# Altium PCB PCB_CONTROL.PcbDoc (part 12 of 15)
Units mil, origin at the board's own origin, x right, y up, seen from the top; angles counter-clockwise.
Board outline 7360.03 x 4773.15 mil, 2 copper layers (Top Layer, Bottom Layer); 73 components, 135 nets, 396 pads, 106 vias.
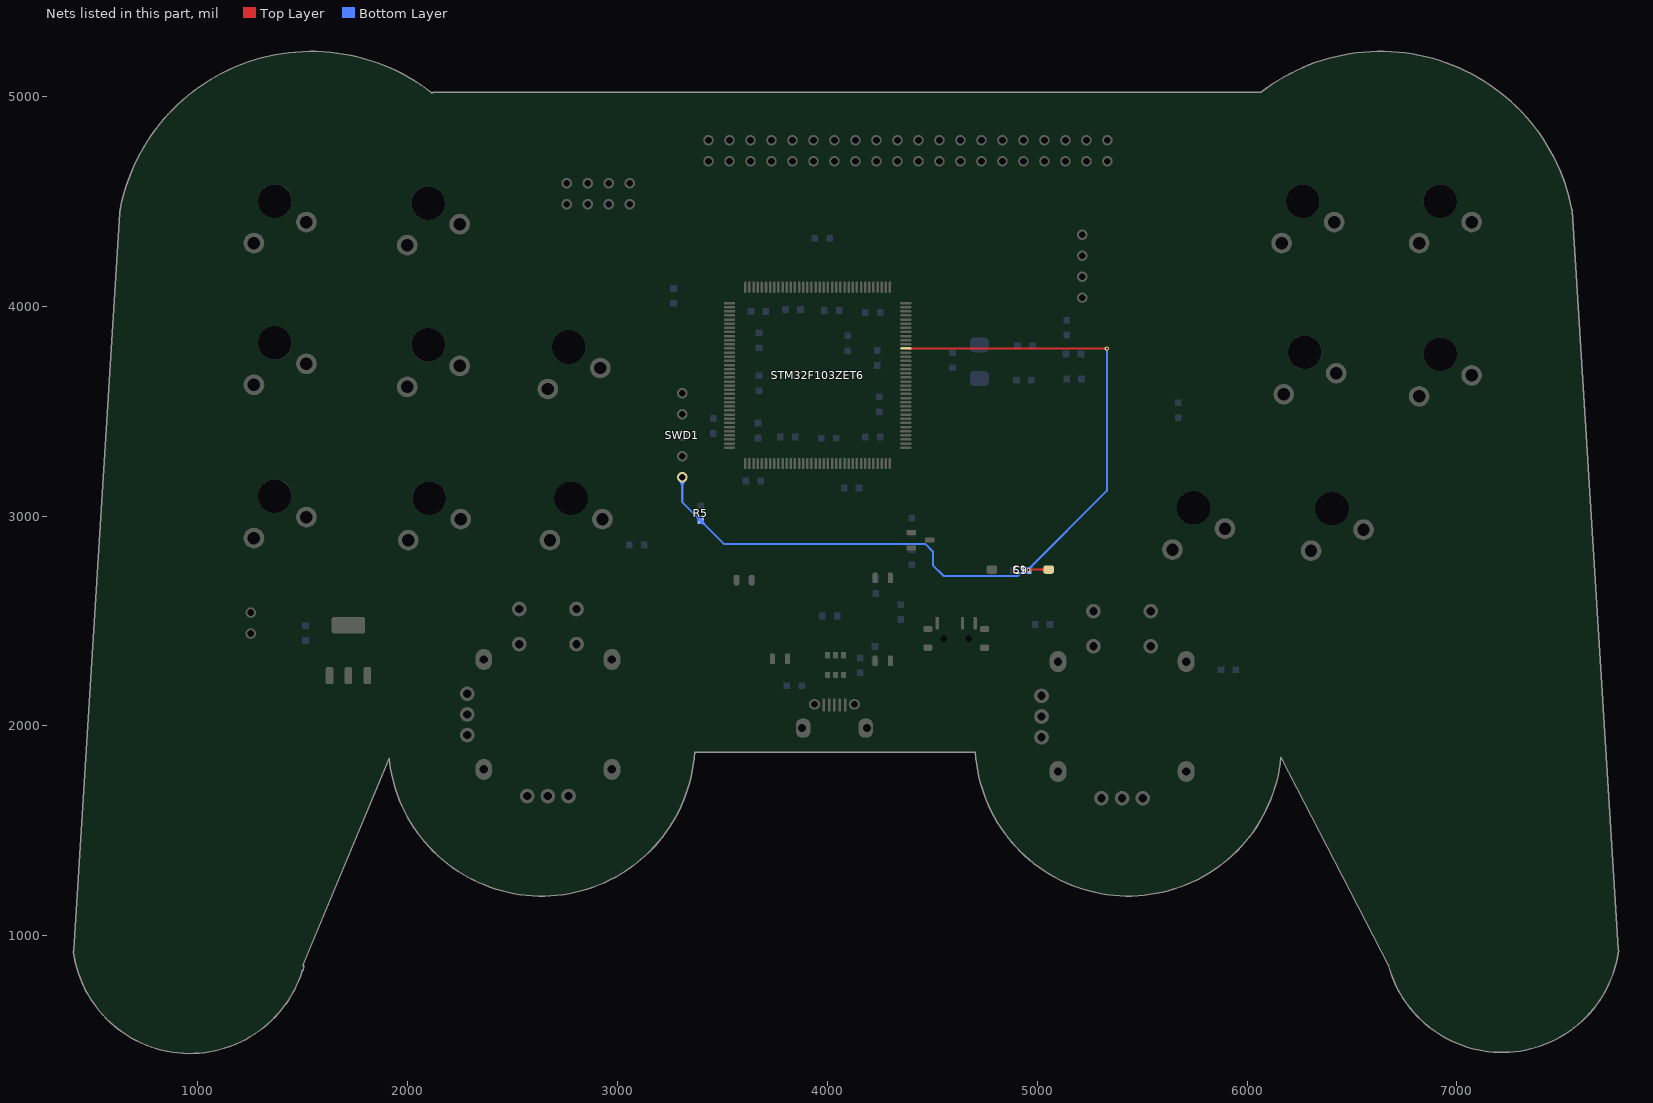
[diagram p12: the nets of this part, all layers, seen from the top]

## Via types
v1: diameter 20, hole 10, Top Layer to Bottom Layer, 104 vias
v2: diameter 30, hole 20, Top Layer to Bottom Layer, 2 vias

## Nets (pads, with @x,y where several pads share a name; then routed paths per layer and width w, separated by ;. In a path a pad name is that pad's centre, name@x,y a point inside that pad or via, vN(x,y) a via of type N, cw(c..) or ccw(c..) an arc to the next point about the centre after c; other vN are vias at no path point) (continued)
NRST: C9.1 R5.1 S1.1 STM32F103ZET6.25 SWD1.5 | length 12548.3
  Top Layer w10: STM32F103ZET6.25@4375,3797.95 STM32F103ZET6.25@4375,3797.95 v1(5332.3,3798) 5292.3,3798 ; STM32F103ZET6.25@4396,3797.95 4432,3798 ; v1@4962,2745 S1.1@5055,2745 ; v1@4962.54,2738.46 cw(c4978.31,2722.69) 4978.31,2745 ; v1@4962.54,2738.46 cw(c4978.31,2722.69) 4978.31,2745 ; v1@4962.54,2738.46 cw(c4978.31,2722.69) 4978.31,2745 ; v1@4962.54,2738.46 cw(c4978.31,2722.69) 4978.31,2745 ; v1@4962.54,2738.46 cw(c4978.31,2722.69) 4978.31,2745 ; v1@4962.54,2738.46 cw(c4978.31,2722.69) 4978.31,2745 ; v1@4962.54,2738.46 cw(c4978.31,2722.69) 4978.31,2745 ; v1@4962.54,2738.46 cw(c4978.31,2722.69) 4978.31,2745 ; v1@4963.27,2744.6 ccw(c4967.59,2747.23) 4970.12,2742.85 ; v1@4963.27,2744.6 ccw(c4967.59,2747.23) 4970.12,2742.85 ; v1@4963.27,2744.6 ccw(c4967.59,2747.23) 4970.12,2742.85 ; v1@4963.27,2744.6 ccw(c4967.59,2747.23) 4970.12,2742.85 ; v1@4963.27,2744.6 ccw(c4967.59,2747.23) 4970.12,2742.85 ; v1@4963.27,2744.6 ccw(c4967.59,2747.23) 4970.12,2742.85 ; v1@4963.27,2744.6 ccw(c4967.59,2747.23) 4970.12,2742.85 ; v1@4963.27,2744.6 ccw(c4967.59,2747.23) 4970.12,2742.85 ; v1@4963.27,2744.6 ccw(c4967.59,2747.23) 4970.12,2742.85 ; v1@4963.27,2744.6 ccw(c4967.59,2747.23) 4970.12,2742.85 ; v1@4963.27,2744.6 ccw(c4967.59,2747.23) 4970.12,2742.85 ; v1@4963.27,2744.6 ccw(c4967.59,2747.23) 4970.12,2742.85 ; v1@4963.27,2744.6 ccw(c4967.59,2747.23) 4970.12,2742.85 ; v1@4963.27,2744.6 ccw(c4967.59,2747.23) 4970.12,2742.85 ; v1@4963.27,2744.6 ccw(c4967.59,2747.23) 4970.12,2742.85 ; v1@4963.27,2744.6 ccw(c4967.59,2747.23) 4970.12,2742.85 ; v1@4963.27,2744.6 ccw(c4967.59,2747.23) 4970.12,2742.85 ; v1@4963.27,2744.6 ccw(c4967.59,2747.23) 4970.12,2742.85 ; v1@4963.27,2744.6 ccw(c4967.59,2747.23) 4970.12,2742.85 ; v1@4963.27,2744.6 ccw(c4967.59,2747.23) 4970.12,2742.85 ; v1@4963.27,2744.6 ccw(c4967.59,2747.23) 4970.12,2742.85 ; v1@4963.27,2744.6 ccw(c4967.59,2747.23) 4970.12,2742.85 ; v1@4963.27,2744.6 ccw(c4967.59,2747.23) 4970.12,2742.85 ; v1@4963.27,2744.6 ccw(c4967.59,2747.23) 4970.12,2742.85 ; v1@4963.27,2744.6 ccw(c4967.59,2747.23) 4970.12,2742.85 ; v1@4963.27,2744.6 ccw(c4967.59,2747.23) 4970.12,2742.85 ; v1@4963.27,2744.6 ccw(c4967.59,2747.23) 4970.12,2742.85 ; v1@4963.27,2744.6 ccw(c4967.59,2747.23) 4970.12,2742.85 ; 5013.79,2745 cw(c5013.79,2708.79) S1.1@5039.39,2734.39 ; 5013.79,2745 ccw(c5013.79,2781.21) S1.1@5039.39,2755.61 ; 5013.79,2745 ccw(c5013.79,2781.21) S1.1@5039.39,2755.61 ; 5013.79,2745 cw(c5013.79,2708.79) S1.1@5039.39,2734.39 ; 5013.79,2745 ccw(c5013.79,2781.21) S1.1@5039.39,2755.61 ; 5013.79,2745 cw(c5013.79,2708.79) S1.1@5039.39,2734.39 ; 5013.79,2745 ccw(c5013.79,2781.21) S1.1@5039.39,2755.61 ; 5013.79,2745 cw(c5013.79,2708.79) S1.1@5039.39,2734.39 ; 5013.79,2745 ccw(c5013.79,2781.21) S1.1@5039.39,2755.61 ; 5013.79,2745 cw(c5013.79,2708.79) S1.1@5039.39,2734.39 ; 5013.79,2745 ccw(c5013.79,2781.21) S1.1@5039.39,2755.61 ; 5013.79,2745 cw(c5013.79,2708.79) S1.1@5039.39,2734.39 ; 5013.79,2745 ccw(c5013.79,2781.21) S1.1@5039.39,2755.61 ; 5013.79,2745 cw(c5013.79,2708.79) S1.1@5039.39,2734.39 ; 5013.79,2745 ccw(c5013.79,2781.21) S1.1@5039.39,2755.61 ; 5013.79,2745 cw(c5013.79,2708.79) S1.1@5039.39,2734.39 ; 5320.23,3798 cw(c5320.23,3785.93) v1@5328.77,3794.46 ; 5320.23,3798 ccw(c5320.23,3810.07) v1@5328.77,3801.54 ; 5320.23,3798 cw(c5320.23,3785.93) v1@5328.77,3794.46 ; 5320.23,3798 ccw(c5320.23,3810.07) v1@5328.77,3801.54 ; 5320.23,3798 ccw(c5320.23,3810.07) v1@5328.77,3801.54 ; 5320.23,3798 cw(c5320.23,3785.93) v1@5328.77,3794.46 ; 5320.23,3798 ccw(c5320.23,3810.07) v1@5328.77,3801.54 ; 5320.23,3798 cw(c5320.23,3785.93) v1@5328.77,3794.46 ; 5320.23,3798 ccw(c5320.23,3810.07) v1@5328.77,3801.54 ; 5320.23,3798 cw(c5320.23,3785.93) v1@5328.77,3794.46 ; 5320.23,3798 ccw(c5320.23,3810.07) v1@5328.77,3801.54 ; 5320.23,3798 cw(c5320.23,3785.93) v1@5328.77,3794.46 ; 5320.23,3798 ccw(c5320.23,3810.07) v1@5328.77,3801.54 ; 5320.23,3798 cw(c5320.23,3785.93) v1@5328.77,3794.46 ; 5320.23,3798 ccw(c5320.23,3810.07) v1@5328.77,3801.54 ; 5320.23,3798 cw(c5320.23,3785.93) v1@5328.77,3794.46 ; 5320.23,3798 ccw(c5320.23,3810.07) v1@5328.77,3801.54 ; 5320.23,3798 cw(c5320.23,3785.93) v1@5328.77,3794.46 ; 5320.23,3798 ccw(c5320.23,3810.07) v1@5328.77,3801.54 ; 5320.23,3798 cw(c5320.23,3785.93) v1@5328.77,3794.46 ; 5320.23,3798 ccw(c5320.23,3810.07) v1@5328.77,3801.54 ; 5320.23,3798 cw(c5320.23,3785.93) v1@5328.77,3794.46 ; 5320.23,3798 ccw(c5320.23,3810.07) v1@5328.77,3801.54 ; 5320.23,3798 cw(c5320.23,3785.93) v1@5328.77,3794.46 ; 5320.23,3798 ccw(c5320.23,3810.07) v1@5328.77,3801.54 ; 5320.23,3798 cw(c5320.23,3785.93) v1@5328.77,3794.46 ; 5320.23,3798 ccw(c5320.23,3810.07) v1@5328.77,3801.54 ; 5320.23,3798 cw(c5320.23,3785.93) v1@5328.77,3794.46 ; 5320.23,3798 ccw(c5320.23,3810.07) v1@5328.77,3801.54 ; 5320.23,3798 cw(c5320.23,3785.93) v1@5328.77,3794.46 ; 5320.23,3798 ccw(c5320.23,3810.07) v1@5328.77,3801.54 ; 5320.23,3798 cw(c5320.23,3785.93) v1@5328.77,3794.46 ; 5320.23,3798 ccw(c5320.23,3810.07) v1@5328.77,3801.54 ; 5320.23,3798 cw(c5320.23,3785.93) v1@5328.77,3794.46
  Bottom Layer w10: SWD1.5@3310,3185 3310,3066 R5.1@3398,2978 3510,2866 4469,2866 4504,2831 4504,2766.3 4556.3,2714 4907.56,2714 4934.56,2741 ; C9.1@4953.65,2751.1 4941.31,2739.79 ; C9.1@4955.14,2751.62 4941.31,2742.21 ; C9.1@4959,2747 5332.3,3120.3 v1(5332.3,3798) 5332.3,3758 ; C9.1@4967.23,2754.07 v1(4959,2742) ; SWD1.5@3295.86,3170.86 cw(c3261.72,3136.72) 3310,3136.72 ; SWD1.5@3295.86,3170.86 cw(c3261.72,3136.72) 3310,3136.72 ; SWD1.5@3295.86,3170.86 cw(c3261.72,3136.72) 3310,3136.72 ; SWD1.5@3295.86,3170.86 cw(c3261.72,3136.72) 3310,3136.72 ; SWD1.5@3295.86,3170.86 cw(c3261.72,3136.72) 3310,3136.72 ; SWD1.5@3295.86,3170.86 cw(c3261.72,3136.72) 3310,3136.72 ; SWD1.5@3295.86,3170.86 cw(c3261.72,3136.72) 3310,3136.72 ; SWD1.5@3295.86,3170.86 cw(c3261.72,3136.72) 3310,3136.72 ; 3310,3136.72 cw(c3358.28,3136.72) SWD1.5@3324.14,3170.86 ; 3310,3136.72 cw(c3358.28,3136.72) SWD1.5@3324.14,3170.86 ; 3310,3136.72 cw(c3358.28,3136.72) SWD1.5@3324.14,3170.86 ; 3310,3136.72 cw(c3358.28,3136.72) SWD1.5@3324.14,3170.86 ; 3310,3136.72 cw(c3358.28,3136.72) SWD1.5@3324.14,3170.86 ; 3310,3136.72 cw(c3358.28,3136.72) SWD1.5@3324.14,3170.86 ; 3310,3136.72 cw(c3358.28,3136.72) SWD1.5@3324.14,3170.86 ; 3310,3136.72 cw(c3358.28,3136.72) SWD1.5@3324.14,3170.86 ; 3379.22,2996.78 cw(c3360.44,2978) R5.1@3387,2978 ; 3379.22,2996.78 ccw(c3398,3015.56) R5.1@3398,2989 ; 3379.22,2996.78 ccw(c3398,3015.56) R5.1@3398,2989 ; 3379.22,2996.78 cw(c3360.44,2978) R5.1@3387,2978 ; 3379.22,2996.78 ccw(c3398,3015.56) R5.1@3398,2989 ; 3379.22,2996.78 cw(c3360.44,2978) R5.1@3387,2978 ; 3379.22,2996.78 ccw(c3398,3015.56) R5.1@3398,2989 ; 3379.22,2996.78 cw(c3360.44,2978) R5.1@3387,2978 ; 3379.22,2996.78 ccw(c3398,3015.56) R5.1@3398,2989 ; 3379.22,2996.78 cw(c3360.44,2978) R5.1@3387,2978 ; 3379.22,2996.78 ccw(c3398,3015.56) R5.1@3398,2989 ; 3379.22,2996.78 cw(c3360.44,2978) R5.1@3387,2978 ; 3379.22,2996.78 ccw(c3398,3015.56) R5.1@3398,2989 ; 3379.22,2996.78 cw(c3360.44,2978) R5.1@3387,2978 ; 3379.22,2996.78 ccw(c3398,3015.56) R5.1@3398,2989 ; 3379.22,2996.78 cw(c3360.44,2978) R5.1@3387,2978 ; R5.1@3398,2967 cw(c3398,2940.44) 3416.78,2959.22 ; R5.1@3398,2967 cw(c3398,2940.44) 3416.78,2959.22 ; R5.1@3398,2967 cw(c3398,2940.44) 3416.78,2959.22 ; R5.1@3398,2967 cw(c3398,2940.44) 3416.78,2959.22 ; R5.1@3398,2967 cw(c3398,2940.44) 3416.78,2959.22 ; R5.1@3398,2967 cw(c3398,2940.44) 3416.78,2959.22 ; R5.1@3398,2967 cw(c3398,2940.44) 3416.78,2959.22 ; R5.1@3398,2967 cw(c3398,2940.44) 3416.78,2959.22 ; R5.1@3409,2978 ccw(c3435.56,2978) 3416.78,2959.22 ; R5.1@3409,2978 ccw(c3435.56,2978) 3416.78,2959.22 ; R5.1@3409,2978 ccw(c3435.56,2978) 3416.78,2959.22 ; R5.1@3409,2978 ccw(c3435.56,2978) 3416.78,2959.22 ; R5.1@3409,2978 ccw(c3435.56,2978) 3416.78,2959.22 ; R5.1@3409,2978 ccw(c3435.56,2978) 3416.78,2959.22 ; R5.1@3409,2978 ccw(c3435.56,2978) 3416.78,2959.22 ; R5.1@3409,2978 ccw(c3435.56,2978) 3416.78,2959.22 ; 4934.56,2741 cw(c4934.56,2721.52) C9.1@4949.54,2733.97 ; 4934.56,2741 ccw(c4934.56,2760.48) C9.1@4949.54,2748.03 ; 4934.56,2741 ccw(c4934.56,2760.48) C9.1@4949.54,2748.03 ; 4934.56,2741 cw(c4934.56,2721.52) C9.1@4949.54,2733.97 ; 4934.56,2741 ccw(c4934.56,2760.48) C9.1@4949.54,2748.03 ; 4934.56,2741 cw(c4934.56,2721.52) C9.1@4949.54,2733.97 ; 4934.56,2741 ccw(c4934.56,2760.48) C9.1@4949.54,2748.03 ; 4934.56,2741 cw(c4934.56,2721.52) C9.1@4949.54,2733.97 ; 4934.56,2741 ccw(c4934.56,2760.48) C9.1@4949.54,2748.03 ; 4934.56,2741 cw(c4934.56,2721.52) C9.1@4949.54,2733.97 ; 4934.56,2741 ccw(c4934.56,2760.48) C9.1@4949.54,2748.03 ; 4934.56,2741 cw(c4934.56,2721.52) C9.1@4949.54,2733.97 ; 4934.56,2741 ccw(c4934.56,2760.48) C9.1@4949.54,2748.03 ; 4934.56,2741 cw(c4934.56,2721.52) C9.1@4949.54,2733.97 ; 4934.56,2741 ccw(c4934.56,2760.48) C9.1@4949.54,2748.03 ; 4934.56,2741 cw(c4934.56,2721.52) C9.1@4949.54,2733.97 ; 4934.56,2741 ccw(c4934.56,2760.48) C9.1@4949.54,2748.03 ; 4934.56,2741 cw(c4934.56,2721.52) C9.1@4949.54,2733.97 ; 4934.56,2741 C9.1@4958,2741 ; 4934.56,2741 v1(4959,2742) ; 4941.31,2739.79 cw(c4941.83,2732.58) C9.1@4948.24,2735.92 ; 4941.31,2739.79 ccw(c4940.79,2747) C9.1@4947.61,2744.62 ; 4941.31,2739.79 ccw(c4940.79,2747) C9.1@4947.61,2744.62 ; 4941.31,2739.79 cw(c4941.83,2732.58) C9.1@4948.24,2735.92 ; 4941.31,2739.79 ccw(c4940.79,2747) C9.1@4947.61,2744.62 ; 4941.31,2739.79 cw(c4941.83,2732.58) C9.1@4948.24,2735.92 ; 4941.31,2739.79 ccw(c4940.79,2747) C9.1@4947.61,2744.62 ; 4941.31,2739.79 cw(c4941.83,2732.58) C9.1@4948.24,2735.92 ; 4941.31,2739.79 ccw(c4940.79,2747) C9.1@4947.61,2744.62 ; 4941.31,2739.79 cw(c4941.83,2732.58) C9.1@4948.24,2735.92 ; 4941.31,2739.79 ccw(c4940.79,2747) C9.1@4947.61,2744.62 ; 4941.31,2739.79 cw(c4941.83,2732.58) C9.1@4948.24,2735.92 ; 4941.31,2739.79 ccw(c4940.79,2747) C9.1@4947.61,2744.62 ; 4941.31,2739.79 cw(c4941.83,2732.58) C9.1@4948.24,2735.92 ; 4941.31,2739.79 ccw(c4940.79,2747) C9.1@4947.61,2744.62 ; 4941.31,2739.79 cw(c4941.83,2732.58) C9.1@4948.24,2735.92 ; 4941.31,2739.79 4955.14,2730.38 v1(4959,2742) ; 4941.31,2739.79 C9.1@4958,2741 ; 4941.31,2739.79 v1(4959,2742) ; 4941.31,2739.79 v1(4959,2742) ; 4941.31,2739.79 v1(4959,2742) ; 4941.31,2739.79 v1(4959,2742) ; 4941.31,2742.21 cw(c4940.79,2735) C9.1@4947.61,2737.38 ; 4941.31,2742.21 ccw(c4941.83,2749.42) C9.1@4948.24,2746.08 ; 4941.31,2742.21 ccw(c4941.83,2749.42) C9.1@4948.24,2746.08 ; 4941.31,2742.21 cw(c4940.79,2735) C9.1@4947.61,2737.38 ; 4941.31,2742.21 ccw(c4941.83,2749.42) C9.1@4948.24,2746.08 ; 4941.31,2742.21 cw(c4940.79,2735) C9.1@4947.61,2737.38 ; 4941.31,2742.21 ccw(c4941.83,2749.42) C9.1@4948.24,2746.08 ; 4941.31,2742.21 cw(c4940.79,2735) C9.1@4947.61,2737.38 ; 4941.31,2742.21 ccw(c4941.83,2749.42) C9.1@4948.24,2746.08 ; 4941.31,2742.21 cw(c4940.79,2735) C9.1@4947.61,2737.38 ; 4941.31,2742.21 ccw(c4941.83,2749.42) C9.1@4948.24,2746.08 ; 4941.31,2742.21 cw(c4940.79,2735) C9.1@4947.61,2737.38 ; 4941.31,2742.21 ccw(c4941.83,2749.42) C9.1@4948.24,2746.08 ; 4941.31,2742.21 cw(c4940.79,2735) C9.1@4947.61,2737.38 ; 4941.31,2742.21 ccw(c4941.83,2749.42) C9.1@4948.24,2746.08 ; 4941.31,2742.21 cw(c4940.79,2735) C9.1@4947.61,2737.38 ; 4941.31,2742.21 4953.65,2730.9 v1(4959,2742) ; 4941.31,2742.21 C9.1@4958,2741 ; 4941.31,2742.21 v1(4959,2742) ; 4941.31,2742.21 v1(4959,2742) ; 4941.31,2742.21 v1(4959,2742) ; 4941.31,2742.21 v1(4959,2742) ; C9.1@4944.51,2741 ccw(c4944.51,2756.49) C9.1@4955.46,2745.54 ; C9.1@4944.51,2741 ccw(c4944.51,2756.49) C9.1@4955.46,2745.54 ; C9.1@4944.51,2741 ccw(c4944.51,2756.49) C9.1@4955.46,2745.54 ; C9.1@4944.51,2741 ccw(c4944.51,2756.49) C9.1@4955.46,2745.54 ; C9.1@4944.51,2741 ccw(c4944.51,2756.49) C9.1@4955.46,2745.54 ; C9.1@4944.51,2741 ccw(c4944.51,2756.49) C9.1@4955.46,2745.54 ; C9.1@4944.51,2741 ccw(c4944.51,2756.49) C9.1@4955.46,2745.54 ; C9.1@4944.51,2741 ccw(c4944.51,2756.49) C9.1@4955.46,2745.54 ; C9.1@4944.51,2741 ccw(c4944.51,2756.49) C9.1@4955.46,2745.54 ; C9.1@4944.8,2740.05 ccw(c4943.7,2755.24) C9.1@4955.22,2745.27 ; C9.1@4944.8,2740.05 ccw(c4943.7,2755.24) C9.1@4955.22,2745.27 ; C9.1@4944.8,2740.05 ccw(c4943.7,2755.24) C9.1@4955.22,2745.27 ; C9.1@4944.8,2740.05 ccw(c4943.7,2755.24) C9.1@4955.22,2745.27 ; C9.1@4944.8,2740.05 ccw(c4943.7,2755.24) C9.1@4955.22,2745.27 ; C9.1@4944.8,2740.05 ccw(c4943.7,2755.24) C9.1@4955.22,2745.27 ; C9.1@4944.8,2740.05 ccw(c4943.7,2755.24) C9.1@4955.22,2745.27 ; C9.1@4944.8,2740.05 ccw(c4943.7,2755.24) C9.1@4955.22,2745.27 ; C9.1@4946.94,2741.51 cw(c4947.43,2729.45) C9.1@4955.61,2738.32 ; C9.1@4946.94,2741.51 ccw(c4946.45,2753.57) C9.1@4955.32,2745.39 ; C9.1@4946.94,2741.51 ccw(c4946.45,2753.57) C9.1@4955.32,2745.39 ; C9.1@4946.94,2741.51 cw(c4947.43,2729.45) C9.1@4955.61,2738.32 ; C9.1@4946.94,2741.51 ccw(c4946.45,2753.57) C9.1@4955.32,2745.39 ; C9.1@4946.94,2741.51 cw(c4947.43,2729.45) C9.1@4955.61,2738.32 ; C9.1@4946.94,2741.51 ccw(c4946.45,2753.57) C9.1@4955.32,2745.39 ; C9.1@4946.94,2741.51 cw(c4947.43,2729.45) C9.1@4955.61,2738.32 ; C9.1@4946.94,2741.51 ccw(c4946.45,2753.57) C9.1@4955.32,2745.39 ; C9.1@4946.94,2741.51 cw(c4947.43,2729.45) C9.1@4955.61,2738.32 ; C9.1@4946.94,2741.51 ccw(c4946.45,2753.57) C9.1@4955.32,2745.39 ; C9.1@4946.94,2741.51 cw(c4947.43,2729.45) C9.1@4955.61,2738.32 ; C9.1@4946.94,2741.51 ccw(c4946.45,2753.57) C9.1@4955.32,2745.39 ; C9.1@4946.94,2741.51 cw(c4947.43,2729.45) C9.1@4955.61,2738.32 ; C9.1@4946.94,2741.51 ccw(c4946.45,2753.57) C9.1@4955.32,2745.39 ; C9.1@4946.94,2741.51 cw(c4947.43,2729.45) C9.1@4955.61,2738.32 ; C9.1@4946.93,2742.14 cw(c4946.79,2730.07) C9.1@4955.42,2738.51 ; C9.1@4946.93,2742.14 ccw(c4947.07,2754.21) C9.1@4955.51,2745.58 ; C9.1@4946.93,2742.14 cw(c4946.79,2730.07) C9.1@4955.42,2738.51 ; C9.1@4946.93,2742.14 ccw(c4947.07,2754.21) C9.1@4955.51,2745.58 ; C9.1@4946.93,2742.14 cw(c4946.79,2730.07) C9.1@4955.42,2738.51 ; C9.1@4946.93,2742.14 ccw(c4947.07,2754.21) C9.1@4955.51,2745.58 ; C9.1@4946.93,2742.14 cw(c4946.79,2730.07) C9.1@4955.42,2738.51 ; C9.1@4946.93,2742.14 ccw(c4947.07,2754.21) C9.1@4955.51,2745.58 ; C9.1@4946.93,2742.14 ccw(c4947.07,2754.21) C9.1@4955.51,2745.58 ; C9.1@4946.93,2742.14 cw(c4946.79,2730.07) C9.1@4955.42,2738.51 ; C9.1@4946.93,2742.14 ccw(c4947.07,2754.21) C9.1@4955.51,2745.58 ; C9.1@4946.93,2742.14 cw(c4946.79,2730.07) C9.1@4955.42,2738.51 ; C9.1@4946.93,2742.14 ccw(c4947.07,2754.21) C9.1@4955.51,2745.58 ; C9.1@4946.93,2742.14 cw(c4946.79,2730.07) C9.1@4955.42,2738.51 ; C9.1@4946.93,2742.14 ccw(c4947.07,2754.21) C9.1@4955.51,2745.58 ; C9.1@4946.93,2742.14 cw(c4946.79,2730.07) C9.1@4955.42,2738.51 ; C9.1@4946.93,2742.14 ccw(c4947.07,2754.21) C9.1@4955.51,2745.58 ; C9.1@4946.93,2742.14 cw(c4946.79,2730.07) C9.1@4955.42,2738.51 ; C9.1@4946.93,2742.14 ccw(c4947.07,2754.21) C9.1@4955.51,2745.58 ; C9.1@4946.93,2742.14 cw(c4946.79,2730.07) C9.1@4955.42,2738.51 ; C9.1@4946.93,2742.14 ccw(c4947.07,2754.21) C9.1@4955.51,2745.58 ; C9.1@4946.93,2742.14 cw(c4946.79,2730.07) C9.1@4955.42,2738.51 ; C9.1@4946.93,2742.14 ccw(c4947.07,2754.21) C9.1@4955.51,2745.58 ; C9.1@4946.93,2742.14 cw(c4946.79,2730.07) C9.1@4955.42,2738.51 ; C9.1@4946.93,2742.14 ccw(c4947.07,2754.21) C9.1@4955.51,2745.58 ; C9.1@4946.93,2742.14 cw(c4946.79,2730.07) C9.1@4955.42,2738.51 ; C9.1@4946.93,2742.14 ccw(c4947.07,2754.21) C9.1@4955.51,2745.58 ; C9.1@4946.93,2742.14 cw(c4946.79,2730.07) C9.1@4955.42,2738.51 ; C9.1@4946.93,2742.14 ccw(c4947.07,2754.21) C9.1@4955.51,2745.58 ; C9.1@4946.93,2742.14 cw(c4946.79,2730.07) C9.1@4955.42,2738.51 ; C9.1@4946.93,2742.14 ccw(c4947.07,2754.21) C9.1@4955.51,2745.58 ; C9.1@4946.93,2742.14 cw(c4946.79,2730.07) C9.1@4955.42,2738.51 ; C9.1@4946.93,2742.14 ccw(c4947.07,2754.21) C9.1@4955.51,2745.58 ; C9.1@4946.93,2742.14 cw(c4946.79,2730.07) C9.1@4955.42,2738.51 ; C9.1@4946.93,2742.14 ccw(c4947.07,2754.21) C9.1@4955.51,2745.58 ; C9.1@4946.93,2742.14 cw(c4946.79,2730.07) C9.1@4955.42,2738.51 ; C9.1@4946.93,2742.14 ccw(c4947.07,2754.21) C9.1@4955.51,2745.58 ; C9.1@4946.93,2742.14 cw(c4946.79,2730.07) C9.1@4955.42,2738.51 ; C9.1@4946.93,2742.14 ccw(c4947.07,2754.21) C9.1@4955.51,2745.58 ; C9.1@4946.93,2742.14 cw(c4946.79,2730.07) C9.1@4955.42,2738.51 ; C9.1@4946.93,2742.14 ccw(c4947.07,2754.21) C9.1@4955.51,2745.58 ; C9.1@4946.93,2742.14 cw(c4946.79,2730.07) C9.1@4955.42,2738.51 ; C9.1@4946.93,2742.14 ccw(c4947.07,2754.21) C9.1@4955.51,2745.58 ; C9.1@4946.93,2742.14 cw(c4946.79,2730.07) C9.1@4955.42,2738.51 ; C9.1@4946.93,2742.14 ccw(c4947.07,2754.21) C9.1@4955.51,2745.58 ; C9.1@4946.93,2742.14 cw(c4946.79,2730.07) C9.1@4955.42,2738.51 ; C9.1@4946.93,2742.14 ccw(c4947.07,2754.21) C9.1@4955.51,2745.58 ; C9.1@4946.93,2742.14 cw(c4946.79,2730.07) C9.1@4955.42,2738.51 ; C9.1@4946.93,2742.14 ccw(c4947.07,2754.21) C9.1@4955.51,2745.58 ; C9.1@4946.93,2742.14 cw(c4946.79,2730.07) C9.1@4955.42,2738.51 ; C9.1@4946.93,2742.14 ccw(c4947.07,2754.21) C9.1@4955.51,2745.58 ; C9.1@4946.93,2742.14 cw(c4946.79,2730.07) C9.1@4955.42,2738.51 ; C9.1@4946.93,2742.14 ccw(c4947.07,2754.21) C9.1@4955.51,2745.58 ; C9.1@4946.93,2742.14 cw(c4946.79,2730.07) C9.1@4955.42,2738.51 ; C9.1@4946.93,2742.14 ccw(c4947.07,2754.21) C9.1@4955.51,2745.58 ; C9.1@4946.93,2742.14 cw(c4946.79,2730.07) C9.1@4955.42,2738.51 ; C9.1@4946.93,2742.14 ccw(c4947.07,2754.21) C9.1@4955.51,2745.58 ; C9.1@4946.93,2742.14 cw(c4946.79,2730.07) C9.1@4955.42,2738.51 ; C9.1@4946.93,2742.14 ccw(c4947.07,2754.21) C9.1@4955.51,2745.58 ; C9.1@4946.93,2742.14 cw(c4946.79,2730.07) C9.1@4955.42,2738.51 ; C9.1@4946.93,2742.14 ccw(c4947.07,2754.21) C9.1@4955.51,2745.58 ; C9.1@4946.93,2742.14 cw(c4946.79,2730.07) C9.1@4955.42,2738.51 ; C9.1@4946.93,2742.14 ccw(c4947.07,2754.21) C9.1@4955.51,2745.58 ; C9.1@4946.93,2742.14 cw(c4946.79,2730.07) C9.1@4955.42,2738.51 ; C9.1@4947.02,2740.51 cw(c4948.52,2728.53) C9.1@4955.93,2738.05 ; C9.1@4947.02,2740.51 ccw(c4945.53,2752.48) C9.1@4955.05,2745.07 ; C9.1@4947.02,2740.51 cw(c4948.52,2728.53) C9.1@4955.93,2738.05 ; C9.1@4947.02,2740.51 ccw(c4945.53,2752.48) C9.1@4955.05,2745.07 ; C9.1@4947.02,2740.51 cw(c4948.52,2728.53) C9.1@4955.93,2738.05 ; C9.1@4947.02,2740.51 ccw(c4945.53,2752.48) C9.1@4955.05,2745.07 ; C9.1@4947.02,2740.51 cw(c4948.52,2728.53) C9.1@4955.93,2738.05 ; C9.1@4947.02,2740.51 ccw(c4945.53,2752.48) C9.1@4955.05,2745.07 ; C9.1@4947.02,2740.51 ccw(c4945.53,2752.48) C9.1@4955.05,2745.07 ; C9.1@4947.02,2740.51 cw(c4948.52,2728.53) C9.1@4955.93,2738.05 ; C9.1@4947.02,2740.51 ccw(c4945.53,2752.48) C9.1@4955.05,2745.07 ; C9.1@4947.02,2740.51 cw(c4948.52,2728.53) C9.1@4955.93,2738.05 ; C9.1@4947.02,2740.51 ccw(c4945.53,2752.48) C9.1@4955.05,2745.07 ; C9.1@4947.02,2740.51 cw(c4948.52,2728.53) C9.1@4955.93,2738.05 ; C9.1@4947.02,2740.51 ccw(c4945.53,2752.48) C9.1@4955.05,2745.07 ; C9.1@4947.02,2740.51 cw(c4948.52,2728.53) C9.1@4955.93,2738.05 ; C9.1@4947.02,2740.51 ccw(c4945.53,2752.48) C9.1@4955.05,2745.07 ; C9.1@4947.02,2740.51 cw(c4948.52,2728.53) C9.1@4955.93,2738.05 ; C9.1@4947.02,2740.51 ccw(c4945.53,2752.48) C9.1@4955.05,2745.07 ; C9.1@4947.02,2740.51 cw(c4948.52,2728.53) C9.1@4955.93,2738.05 ; C9.1@4947.02,2740.51 ccw(c4945.53,2752.48) C9.1@4955.05,2745.07 ; C9.1@4947.02,2740.51 cw(c4948.52,2728.53) C9.1@4955.93,2738.05 ; C9.1@4947.02,2740.51 ccw(c4945.53,2752.48) C9.1@4955.05,2745.07 ; C9.1@4947.02,2740.51 cw(c4948.52,2728.53) C9.1@4955.93,2738.05 ; C9.1@4947.02,2740.51 ccw(c4945.53,2752.48) C9.1@4955.05,2745.07 ; C9.1@4947.02,2740.51 cw(c4948.52,2728.53) C9.1@4955.93,2738.05 ; C9.1@4947.02,2740.51 ccw(c4945.53,2752.48) C9.1@4955.05,2745.07 ; C9.1@4947.02,2740.51 cw(c4948.52,2728.53) C9.1@4955.93,2738.05 ; C9.1@4947.02,2740.51 ccw(c4945.53,2752.48) C9.1@4955.05,2745.07 ; C9.1@4947.02,2740.51 cw(c4948.52,2728.53) C9.1@4955.93,2738.05 ; C9.1@4947.02,2740.51 ccw(c4945.53,2752.48) C9.1@4955.05,2745.07 ; C9.1@4947.02,2740.51 cw(c4948.52,2728.53) C9.1@4955.93,2738.05 ; C9.1@4947.02,2740.51 ccw(c4945.53,2752.48) C9.1@4955.05,2745.07 ; C9.1@4947.02,2740.51 cw(c4948.52,2728.53) C9.1@4955.93,2738.05 ; C9.1@4947.02,2740.51 ccw(c4945.53,2752.48) C9.1@4955.05,2745.07 ; C9.1@4947.02,2740.51 cw(c4948.52,2728.53) C9.1@4955.93,2738.05 ; C9.1@4947.02,2740.51 ccw(c4945.53,2752.48) C9.1@4955.05,2745.07 ; C9.1@4947.02,2740.51 cw(c4948.52,2728.53) C9.1@4955.93,2738.05 ; C9.1@4947.02,2740.51 ccw(c4945.53,2752.48) C9.1@4955.05,2745.07 ; C9.1@4947.02,2740.51 cw(c4948.52,2728.53) C9.1@4955.93,2738.05 ; C9.1@4947.02,2740.51 ccw(c4945.53,2752.48) C9.1@4955.05,2745.07 ; C9.1@4947.02,2740.51 cw(c4948.52,2728.53) C9.1@4955.93,2738.05 ; C9.1@4947.02,2740.51 ccw(c4945.53,2752.48) C9.1@4955.05,2745.07 ; C9.1@4947.02,2740.51 cw(c4948.52,2728.53) C9.1@4955.93,2738.05 ; C9.1@4947.02,2740.51 ccw(c4945.53,2752.48) C9.1@4955.05,2745.07 ; C9.1@4947.02,2740.51 cw(c4948.52,2728.53) C9.1@4955.93,2738.05 ; C9.1@4947.02,2740.51 ccw(c4945.53,2752.48) C9.1@4955.05,2745.07 ; C9.1@4947.02,2740.51 cw(c4948.52,2728.53) C9.1@4955.93,2738.05 ; C9.1@4947.02,2740.51 ccw(c4945.53,2752.48) C9.1@4955.05,2745.07 ; C9.1@4947.02,2740.51 cw(c4948.52,2728.53) C9.1@4955.93,2738.05 ; C9.1@4947.02,2740.51 ccw(c4945.53,2752.48) C9.1@4955.05,2745.07 ; C9.1@4947.02,2740.51 cw(c4948.52,2728.53) C9.1@4955.93,2738.05 ; C9.1@4947.02,2740.51 ccw(c4945.53,2752.48) C9.1@4955.05,2745.07 ; C9.1@4947.02,2740.51 cw(c4948.52,2728.53) C9.1@4955.93,2738.05 ; C9.1@4947.02,2740.51 ccw(c4945.53,2752.48) C9.1@4955.05,2745.07 ; C9.1@4947.02,2740.51 cw(c4948.52,2728.53) C9.1@4955.93,2738.05 ; C9.1@4947.02,2740.51 ccw(c4945.53,2752.48) C9.1@4955.05,2745.07 ; C9.1@4947.02,2740.51 cw(c4948.52,2728.53) C9.1@4955.93,2738.05 ; C9.1@4947.02,2740.51 ccw(c4945.53,2752.48) C9.1@4955.05,2745.07 ; C9.1@4947.02,2740.51 cw(c4948.52,2728.53) C9.1@4955.93,2738.05 ; C9.1@4947.02,2740.51 ccw(c4945.53,2752.48) C9.1@4955.05,2745.07 ; C9.1@4947.02,2740.51 cw(c4948.52,2728.53) C9.1@4955.93,2738.05 ; C9.1@4947.02,2740.51 ccw(c4945.53,2752.48) C9.1@4955.05,2745.07 ; C9.1@4947.02,2740.51 cw(c4948.52,2728.53) C9.1@4955.93,2738.05 ; C9.1@4948.52,2741.53 cw(c4948.91,2733.04) C9.1@4955.26,2738.68 ; C9.1@4948.52,2741.53 ccw(c4948.14,2750.02) C9.1@4954.98,2744.97 ; C9.1@4948.52,2741.53 ccw(c4948.14,2750.02) C9.1@4954.98,2744.97 ; C9.1@4948.52,2741.53 cw(c4948.91,2733.04) C9.1@4955.26,2738.68 ; C9.1@4948.52,2741.53 ccw(c4948.14,2750.02) C9.1@4954.98,2744.97 ; C9.1@4948.52,2741.53 cw(c4948.91,2733.04) C9.1@4955.26,2738.68 ; C9.1@4948.52,2741.53 ccw(c4948.14,2750.02) C9.1@4954.98,2744.97 ; C9.1@4948.52,2741.53 cw(c4948.91,2733.04) C9.1@4955.26,2738.68 ; C9.1@4948.52,2741.53 ccw(c4948.14,2750.02) C9.1@4954.98,2744.97 ; C9.1@4948.52,2741.53 cw(c4948.91,2733.04) C9.1@4955.26,2738.68 ; C9.1@4948.52,2741.53 ccw(c4948.14,2750.02) C9.1@4954.98,2744.97 ; C9.1@4948.52,2741.53 cw(c4948.91,2733.04) C9.1@4955.26,2738.68 ; C9.1@4948.52,2741.53 ccw(c4948.14,2750.02) C9.1@4954.98,2744.97 ; C9.1@4948.52,2741.53 cw(c4948.91,2733.04) C9.1@4955.26,2738.68 ; C9.1@4948.52,2741.53 ccw(c4948.14,2750.02) C9.1@4954.98,2744.97 ; C9.1@4948.52,2741.53 cw(c4948.91,2733.04) C9.1@4955.26,2738.68 ; C9.1@4948.52,2741.53 v1(4959,2742) ; C9.1@4948.65,2741.68 ccw(c4949.13,2748.44) C9.1@4954.81,2744.73 ; C9.1@4948.65,2741.68 ccw(c4949.13,2748.44) C9.1@4954.81,2744.73 ; C9.1@4948.65,2741.68 ccw(c4949.13,2748.44) C9.1@4954.81,2744.73 ; C9.1@4948.65,2741.68 ccw(c4949.13,2748.44) C9.1@4954.81,2744.73 ; C9.1@4948.65,2741.68 ccw(c4949.13,2748.44) C9.1@4954.81,2744.73 ; C9.1@4948.65,2741.68 ccw(c4949.13,2748.44) C9.1@4954.81,2744.73 ; C9.1@4948.65,2741.68 ccw(c4949.13,2748.44) C9.1@4954.81,2744.73 ; C9.1@4948.65,2741.68 ccw(c4949.13,2748.44) C9.1@4954.81,2744.73 ; C9.1@4953.76,2731.13 cw(c4964.63,2725.88) C9.1@4960.65,2737.28 ; C9.1@4953.76,2731.13 ccw(c4942.88,2736.37) C9.1@4954.28,2740.35 ; C9.1@4953.76,2731.13 ccw(c4942.88,2736.37) C9.1@4954.28,2740.35 ; C9.1@4953.76,2731.13 cw(c4964.63,2725.88) C9.1@4960.65,2737.28 ; C9.1@4953.76,2731.13 ccw(c4942.88,2736.37) C9.1@4954.28,2740.35 ; C9.1@4953.76,2731.13 cw(c4964.63,2725.88) C9.1@4960.65,2737.28 ; C9.1@4953.76,2731.13 ccw(c4942.88,2736.37) C9.1@4954.28,2740.35 ; C9.1@4953.76,2731.13 cw(c4964.63,2725.88) C9.1@4960.65,2737.28 ; C9.1@4953.76,2731.13 ccw(c4942.88,2736.37) C9.1@4954.28,2740.35 ; C9.1@4953.76,2731.13 cw(c4964.63,2725.88) C9.1@4960.65,2737.28 ; C9.1@4953.76,2731.13 ccw(c4942.88,2736.37) C9.1@4954.28,2740.35 ; C9.1@4953.76,2731.13 cw(c4964.63,2725.88) C9.1@4960.65,2737.28 ; C9.1@4953.76,2731.13 ccw(c4942.88,2736.37) C9.1@4954.28,2740.35 ; C9.1@4953.76,2731.13 cw(c4964.63,2725.88) C9.1@4960.65,2737.28 ; C9.1@4953.76,2731.13 ccw(c4942.88,2736.37) C9.1@4954.28,2740.35 ; C9.1@4953.76,2731.13 cw(c4964.63,2725.88) C9.1@4960.65,2737.28 ; C9.1@4954.19,2743.37 cw(c4968.72,2739.24) C9.1@4964.81,2753.82 ; C9.1@4954.19,2743.37 cw(c4968.72,2739.24) C9.1@4964.81,2753.82 ; C9.1@4954.19,2743.37 cw(c4968.72,2739.24) C9.1@4964.81,2753.82 ; C9.1@4954.19,2743.37 cw(c4968.72,2739.24) C9.1@4964.81,2753.82 ; C9.1@4954.19,2743.37 cw(c4968.72,2739.24) C9.1@4964.81,2753.82 ; C9.1@4954.19,2743.37 cw(c4968.72,2739.24) C9.1@4964.81,2753.82 ; C9.1@4954.19,2743.37 cw(c4968.72,2739.24) C9.1@4964.81,2753.82 ; C9.1@4954.19,2743.37 cw(c4968.72,2739.24) C9.1@4964.81,2753.82 ; C9.1@4954.19,2743.37 cw(c4968.72,2739.24) C9.1@4964.81,2753.82 ; C9.1@4954.19,2743.37 cw(c4968.72,2739.24) C9.1@4964.81,2753.82 ; C9.1@4954.19,2743.37 cw(c4968.72,2739.24) C9.1@4964.81,2753.82 ; C9.1@4954.19,2743.37 cw(c4968.72,2739.24) C9.1@4964.81,2753.82 ; C9.1@4954.19,2743.37 cw(c4968.72,2739.24) C9.1@4964.81,2753.82 ; C9.1@4954.19,2743.37 cw(c4968.72,2739.24) C9.1@4964.81,2753.82 ; C9.1@4954.19,2743.37 cw(c4968.72,2739.24) C9.1@4964.81,2753.82 ; C9.1@4954.19,2743.37 cw(c4968.72,2739.24) C9.1@4964.81,2753.82 ; C9.1@4954.19,2743.37 cw(c4968.72,2739.24) C9.1@4964.81,2753.82 ; C9.1@4954.19,2743.37 cw(c4968.72,2739.24) C9.1@4964.81,2753.82 ; C9.1@4954.19,2743.37 cw(c4968.72,2739.24) C9.1@4964.81,2753.82 ; C9.1@4954.19,2743.37 cw(c4968.72,2739.24) C9.1@4964.81,2753.82 ; C9.1@4954.19,2743.37 cw(c4968.72,2739.24) C9.1@4964.81,2753.82 ; C9.1@4954.19,2743.37 cw(c4968.72,2739.24) C9.1@4964.81,2753.82 ; C9.1@4954.19,2743.37 cw(c4968.72,2739.24) C9.1@4964.81,2753.82 ; C9.1@4954.19,2743.37 cw(c4968.72,2739.24) C9.1@4964.81,2753.82 ; C9.1@4954.19,2743.37 cw(c4968.72,2739.24) C9.1@4964.81,2753.82 ; C9.1@4954.19,2743.37 cw(c4968.72,2739.24) C9.1@4964.81,2753.82 ; C9.1@4954.19,2743.37 cw(c4968.72,2739.24) C9.1@4964.81,2753.82 ; C9.1@4954.19,2743.37 cw(c4968.72,2739.24) C9.1@4964.81,2753.82 ; C9.1@4954.19,2743.37 cw(c4968.72,2739.24) C9.1@4964.81,2753.82 ; C9.1@4954.19,2743.37 cw(c4968.72,2739.24) C9.1@4964.81,2753.82 ; C9.1@4954.19,2743.37 cw(c4968.72,2739.24) C9.1@4964.81,2753.82 ; C9.1@4954.19,2743.37 cw(c4968.72,2739.24) C9.1@4964.81,2753.82 ; C9.1@4954.19,2743.37 cw(c4968.72,2739.24) C9.1@4964.81,2753.82 ; C9.1@4954.19,2743.37 cw(c4968.72,2739.24) C9.1@4964.81,2753.82 ; C9.1@4954.19,2743.37 cw(c4968.72,2739.24) C9.1@4964.81,2753.82 ; C9.1@4954.19,2743.37 cw(c4968.72,2739.24) C9.1@4964.81,2753.82 ; C9.1@4954.53,2739.76 cw(c4943.74,2734.34) C9.1@4955.2,2730.54 ; C9.1@4954.53,2739.76 cw(c4943.74,2734.34) C9.1@4955.2,2730.54 ; C9.1@4954.53,2739.76 cw(c4943.74,2734.34) C9.1@4955.2,2730.54 ; C9.1@4954.53,2739.76 cw(c4943.74,2734.34) C9.1@4955.2,2730.54 ; C9.1@4954.53,2739.76 cw(c4943.74,2734.34) C9.1@4955.2,2730.54 ; C9.1@4954.53,2739.76 cw(c4943.74,2734.34) C9.1@4955.2,2730.54 ; C9.1@4954.53,2739.76 cw(c4943.74,2734.34) C9.1@4955.2,2730.54 ; C9.1@4954.53,2739.76 cw(c4943.74,2734.34) C9.1@4955.2,2730.54 ; C9.1@4955.2,2730.54 cw(c4966.66,2726.74) C9.1@4961.24,2737.53 ; C9.1@4955.2,2730.54 cw(c4966.66,2726.74) C9.1@4961.24,2737.53 ; C9.1@4955.2,2730.54 cw(c4966.66,2726.74) C9.1@4961.24,2737.53 ; C9.1@4955.2,2730.54 cw(c4966.66,2726.74) C9.1@4961.24,2737.53 ; C9.1@4955.2,2730.54 cw(c4966.66,2726.74) C9.1@4961.24,2737.53 ; C9.1@4955.2,2730.54 cw(c4966.66,2726.74) C9.1@4961.24,2737.53 ; C9.1@4955.2,2730.54 cw(c4966.66,2726.74) C9.1@4961.24,2737.53 ; C9.1@4955.2,2730.54 cw(c4966.66,2726.74) C9.1@4961.24,2737.53 ; C9.1@4957.66,2741.94 ccw(c4948.93,2766.38) 4974,2759.67 ; C9.1@4957.66,2741.94 ccw(c4948.93,2766.38) 4974,2759.67 ; C9.1@4957.66,2741.94 ccw(c4948.93,2766.38) 4974,2759.67 ; C9.1@4957.66,2741.94 ccw(c4948.93,2766.38) 4974,2759.67 ; C9.1@4957.66,2741.94 ccw(c4948.93,2766.38) 4974,2759.67 ; C9.1@4957.66,2741.94 ccw(c4948.93,2766.38) 4974,2759.67 ; C9.1@4957.66,2741.94 ccw(c4948.93,2766.38) 4974,2759.67 ; C9.1@4957.66,2741.94 ccw(c4948.93,2766.38) 4974,2759.67 ; C9.1@4957.66,2741.94 ccw(c4948.93,2766.38) 4974,2759.67 ; C9.1@4957.66,2741.94 ccw(c4948.93,2766.38) 4974,2759.67 ; C9.1@4957.66,2741.94 ccw(c4948.93,2766.38) 4974,2759.67 ; C9.1@4957.66,2741.94 ccw(c4948.93,2766.38) 4974,2759.67 ; C9.1@4957.66,2741.94 ccw(c4948.93,2766.38) 4974,2759.67 ; C9.1@4957.66,2741.94 ccw(c4948.93,2766.38) 4974,2759.67 ; C9.1@4957.66,2741.94 ccw(c4948.93,2766.38) 4974,2759.67 ; C9.1@4957.66,2741.94 ccw(c4948.93,2766.38) 4974,2759.67 ; C9.1@4957.66,2741.94 ccw(c4948.93,2766.38) 4974,2759.67 ; C9.1@4957.66,2741.94 ccw(c4948.93,2766.38) 4974,2759.67 ; C9.1@4957.66,2741.94 ccw(c4948.93,2766.38) 4974,2759.67 ; C9.1@4957.66,2741.94 ccw(c4948.93,2766.38) 4974,2759.67 ; C9.1@4957.66,2741.94 ccw(c4948.93,2766.38) 4974,2759.67 ; C9.1@4957.66,2741.94 ccw(c4948.93,2766.38) 4974,2759.67 ; C9.1@4957.66,2741.94 ccw(c4948.93,2766.38) 4974,2759.67 ; C9.1@4957.66,2741.94 ccw(c4948.93,2766.38) 4974,2759.67 ; C9.1@4957.66,2741.94 ccw(c4948.93,2766.38) 4974,2759.67 ; C9.1@4957.66,2741.94 ccw(c4948.93,2766.38) 4974,2759.67 ; C9.1@4957.66,2741.94 ccw(c4948.93,2766.38) 4974,2759.67 ; C9.1@4957.66,2741.94 ccw(c4948.93,2766.38) 4974,2759.67 ; C9.1@4958,2752 ccw(c4958,2766.49) C9.1@4968.24,2756.24 ; C9.1@4958,2752 ccw(c4958,2766.49) C9.1@4968.24,2756.24 ; C9.1@4958,2752 ccw(c4958,2766.49) C9.1@4968.24,2756.24 ; C9.1@4958,2752 ccw(c4958,2766.49) C9.1@4968.24,2756.24 ; C9.1@4958,2752 ccw(c4958,2766.49) C9.1@4968.24,2756.24 ; C9.1@4958,2752 ccw(c4958,2766.49) C9.1@4968.24,2756.24 ; C9.1@4958,2752 ccw(c4958,2766.49) C9.1@4968.24,2756.24 ; C9.1@4958,2752 ccw(c4958,2766.49) C9.1@4968.24,2756.24 ; C9.1@4958.07,2746.91 ccw(c4955.83,2758.77) C9.1@4965.8,2751.97 ; C9.1@4958.07,2746.91 ccw(c4955.83,2758.77) C9.1@4965.8,2751.97 ; C9.1@4958.07,2746.91 ccw(c4955.83,2758.77) C9.1@4965.8,2751.97 ; C9.1@4958.07,2746.91 ccw(c4955.83,2758.77) C9.1@4965.8,2751.97 ; C9.1@4958.07,2746.91 ccw(c4955.83,2758.77) C9.1@4965.8,2751.97 ; C9.1@4958.07,2746.91 ccw(c4955.83,2758.77) C9.1@4965.8,2751.97 ; C9.1@4958.07,2746.91 ccw(c4955.83,2758.77) C9.1@4965.8,2751.97 ; C9.1@4958.07,2746.91 ccw(c4955.83,2758.77) C9.1@4965.8,2751.97 ; C9.1@4961.5,2737.67 ccw(c4950.6,2756.54) C9.1@4971.65,2750.9 ; C9.1@4961.5,2737.67 ccw(c4950.6,2756.54) C9.1@4971.65,2750.9 ; C9.1@4961.5,2737.67 ccw(c4950.6,2756.54) C9.1@4971.65,2750.9 ; C9.1@4961.5,2737.67 ccw(c4950.6,2756.54) C9.1@4971.65,2750.9 ; C9.1@4961.5,2737.67 ccw(c4950.6,2756.54) C9.1@4971.65,2750.9 ; C9.1@4961.5,2737.67 ccw(c4950.6,2756.54) C9.1@4971.65,2750.9 ; C9.1@4961.5,2737.67 ccw(c4950.6,2756.54) C9.1@4971.65,2750.9 ; C9.1@4961.5,2737.67 ccw(c4950.6,2756.54) C9.1@4971.65,2750.9 ; C9.1@4961.5,2737.67 ccw(c4950.6,2756.54) C9.1@4971.65,2750.9 ; C9.1@4961.5,2737.67 ccw(c4950.6,2756.54) C9.1@4971.65,2750.9 ; C9.1@4961.5,2737.67 ccw(c4950.6,2756.54) C9.1@4971.65,2750.9 ; C9.1@4961.5,2737.67 ccw(c4950.6,2756.54) C9.1@4971.65,2750.9 ; C9.1@4961.5,2737.67 ccw(c4950.6,2756.54) C9.1@4971.65,2750.9 ; C9.1@4961.5,2737.67 ccw(c4950.6,2756.54) C9.1@4971.65,2750.9 ; C9.1@4961.5,2737.67 ccw(c4950.6,2756.54) C9.1@4971.65,2750.9 ; C9.1@4961.5,2737.67 ccw(c4950.6,2756.54) C9.1@4971.65,2750.9 ; C9.1@4961.5,2737.67 ccw(c4950.6,2756.54) C9.1@4971.65,2750.9 ; C9.1@4961.5,2737.67 ccw(c4950.6,2756.54) C9.1@4971.65,2750.9 ; C9.1@4961.5,2737.67 ccw(c4950.6,2756.54) C9.1@4971.65,2750.9 ; C9.1@4961.5,2737.67 ccw(c4950.6,2756.54) C9.1@4971.65,2750.9 ; C9.1@4961.5,2737.67 ccw(c4950.6,2756.54) C9.1@4971.65,2750.9 ; C9.1@4961.5,2737.67 ccw(c4950.6,2756.54) C9.1@4971.65,2750.9 ; C9.1@4961.5,2737.67 ccw(c4950.6,2756.54) C9.1@4971.65,2750.9 ; C9.1@4961.5,2737.67 ccw(c4950.6,2756.54) C9.1@4971.65,2750.9 ; C9.1@4961.5,2737.67 ccw(c4950.6,2756.54) C9.1@4971.65,2750.9 ; C9.1@4961.5,2737.67 ccw(c4950.6,2756.54) C9.1@4971.65,2750.9 ; C9.1@4961.5,2737.67 ccw(c4950.6,2756.54) C9.1@4971.65,2750.9 ; C9.1@4961.5,2737.67 ccw(c4950.6,2756.54) C9.1@4971.65,2750.9 ; C9.1@4961.5,2737.67 ccw(c4950.6,2756.54) C9.1@4971.65,2750.9 ; C9.1@4961.5,2737.67 ccw(c4950.6,2756.54) C9.1@4971.65,2750.9 ; C9.1@4961.5,2737.67 ccw(c4950.6,2756.54) C9.1@4971.65,2750.9 ; C9.1@4961.5,2737.67 ccw(c4950.6,2756.54) C9.1@4971.65,2750.9 ; C9.1@4961.5,2737.67 ccw(c4950.6,2756.54) C9.1@4971.65,2750.9 ; C9.1@4961.5,2737.67 ccw(c4950.6,2756.54) C9.1@4971.65,2750.9 ; C9.1@4961.5,2737.67 ccw(c4950.6,2756.54) C9.1@4971.65,2750.9 ; C9.1@4961.5,2737.67 ccw(c4950.6,2756.54) C9.1@4971.65,2750.9 ; C9.1@4963.91,2742.93 cw(c4975.77,2745.17) C9.1@4965.8,2751.97 ; C9.1@4963.91,2742.93 cw(c4975.77,2745.17) C9.1@4965.8,2751.97 ; C9.1@4963.91,2742.93 cw(c4975.77,2745.17) C9.1@4965.8,2751.97 ; C9.1@4963.91,2742.93 cw(c4975.77,2745.17) C9.1@4965.8,2751.97 ; C9.1@4963.91,2742.93 cw(c4975.77,2745.17) C9.1@4965.8,2751.97 ; C9.1@4963.91,2742.93 cw(c4975.77,2745.17) C9.1@4965.8,2751.97 ; C9.1@4963.91,2742.93 cw(c4975.77,2745.17) C9.1@4965.8,2751.97 ; C9.1@4963.91,2742.93 cw(c4975.77,2745.17) C9.1@4965.8,2751.97 ; C9.1@4964,2742 cw(c4988.14,2742) 4971.07,2759.07 ; C9.1@4964,2742 cw(c4988.14,2742) 4971.07,2759.07 ; C9.1@4964,2742 cw(c4988.14,2742) 4971.07,2759.07 ; C9.1@4964,2742 cw(c4988.14,2742) 4971.07,2759.07 ; C9.1@4964,2742 cw(c4988.14,2742) 4971.07,2759.07 ; C9.1@4964,2742 cw(c4988.14,2742) 4971.07,2759.07 ; C9.1@4964,2742 cw(c4988.14,2742) 4971.07,2759.07 ; C9.1@4964,2742 cw(c4988.14,2742) 4971.07,2759.07 ; C9.1@4964,2742 cw(c4988.14,2742) 4971.07,2759.07 ; C9.1@4969,2741 cw(c5007.63,2741) 4980.31,2768.31 ; C9.1@4969,2741 cw(c5007.63,2741) 4980.31,2768.31 ; C9.1@4969,2741 cw(c5007.63,2741) 4980.31,2768.31 ; C9.1@4969,2741 cw(c5007.63,2741) 4980.31,2768.31 ; C9.1@4969,2741 cw(c5007.63,2741) 4980.31,2768.31 ; C9.1@4969,2741 cw(c5007.63,2741) 4980.31,2768.31 ; C9.1@4969,2741 cw(c5007.63,2741) 4980.31,2768.31 ; C9.1@4969,2741 cw(c5007.63,2741) 4980.31,2768.31 ; v1@5328.77,3794.46 cw(c5320.23,3785.93) 5332.3,3785.93 ; v1@5328.77,3794.46 cw(c5320.23,3785.93) 5332.3,3785.93 ; v1@5328.77,3794.46 cw(c5320.23,3785.93) 5332.3,3785.93 ; v1@5328.77,3794.46 cw(c5320.23,3785.93) 5332.3,3785.93 ; v1@5328.77,3794.46 cw(c5320.23,3785.93) 5332.3,3785.93 ; v1@5328.77,3794.46 cw(c5320.23,3785.93) 5332.3,3785.93 ; v1@5328.77,3794.46 cw(c5320.23,3785.93) 5332.3,3785.93 ; v1@5328.77,3794.46 cw(c5320.23,3785.93) 5332.3,3785.93 ; v1@5328.77,3794.46 cw(c5320.23,3785.93) 5332.3,3785.93 ; v1@5328.77,3794.46 cw(c5320.23,3785.93) 5332.3,3785.93 ; v1@5328.77,3794.46 cw(c5320.23,3785.93) 5332.3,3785.93 ; v1@5328.77,3794.46 cw(c5320.23,3785.93) 5332.3,3785.93 ; v1@5328.77,3794.46 cw(c5320.23,3785.93) 5332.3,3785.93 ; v1@5328.77,3794.46 cw(c5320.23,3785.93) 5332.3,3785.93 ; v1@5328.77,3794.46 cw(c5320.23,3785.93) 5332.3,3785.93 ; v1@5328.77,3794.46 cw(c5320.23,3785.93) 5332.3,3785.93 ; v1@5328.77,3794.46 cw(c5320.23,3785.93) 5332.3,3785.93 ; 5332.3,3785.93 cw(c5344.37,3785.93) v1@5335.84,3794.46 ; 5332.3,3785.93 cw(c5344.37,3785.93) v1@5335.84,3794.46 ; 5332.3,3785.93 cw(c5344.37,3785.93) v1@5335.84,3794.46 ; 5332.3,3785.93 cw(c5344.37,3785.93) v1@5335.84,3794.46 ; 5332.3,3785.93 cw(c5344.37,3785.93) v1@5335.84,3794.46 ; 5332.3,3785.93 cw(c5344.37,3785.93) v1@5335.84,3794.46 ; 5332.3,3785.93 cw(c5344.37,3785.93) v1@5335.84,3794.46 ; 5332.3,3785.93 cw(c5344.37,3785.93) v1@5335.84,3794.46 ; 5332.3,3785.93 cw(c5344.37,3785.93) v1@5335.84,3794.46 ; 5332.3,3785.93 cw(c5344.37,3785.93) v1@5335.84,3794.46 ; 5332.3,3785.93 cw(c5344.37,3785.93) v1@5335.84,3794.46 ; 5332.3,3785.93 cw(c5344.37,3785.93) v1@5335.84,3794.46 ; 5332.3,3785.93 cw(c5344.37,3785.93) v1@5335.84,3794.46 ; 5332.3,3785.93 cw(c5344.37,3785.93) v1@5335.84,3794.46 ; 5332.3,3785.93 cw(c5344.37,3785.93) v1@5335.84,3794.46 ; 5332.3,3785.93 cw(c5344.37,3785.93) v1@5335.84,3794.46 ; 5332.3,3785.93 cw(c5344.37,3785.93) v1@5335.84,3794.46